# EAGLE board crazypi (EAGLE 9.1.1)
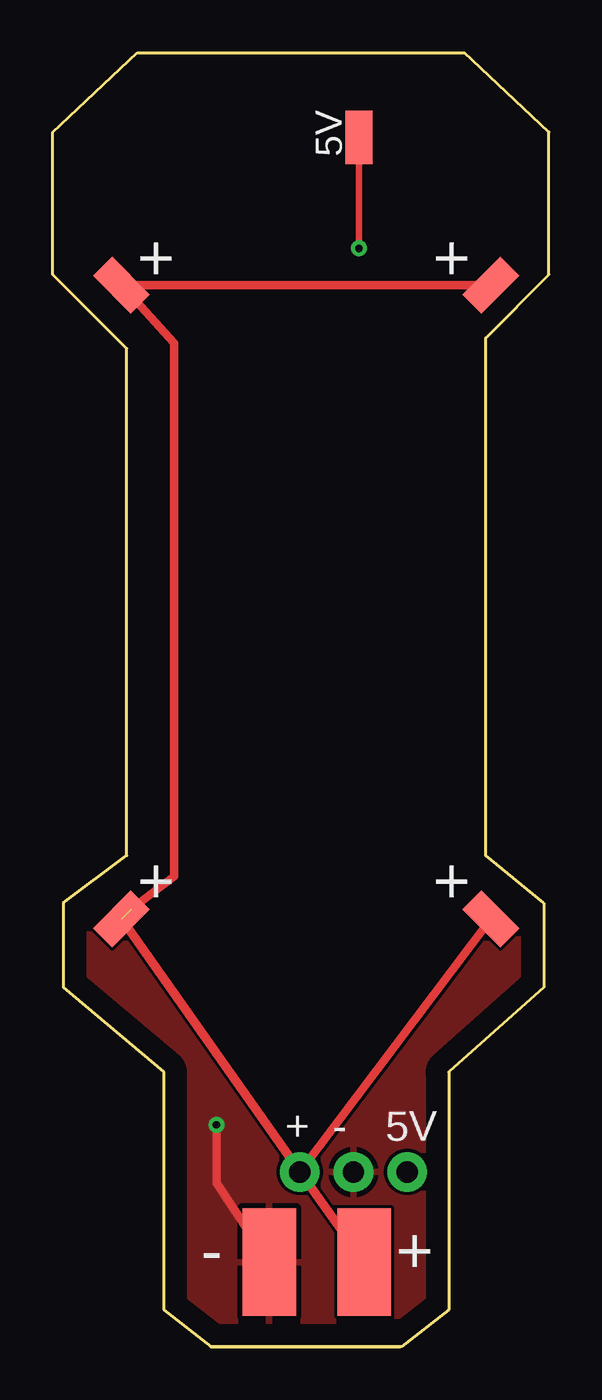
[diagram p0: board, top side]
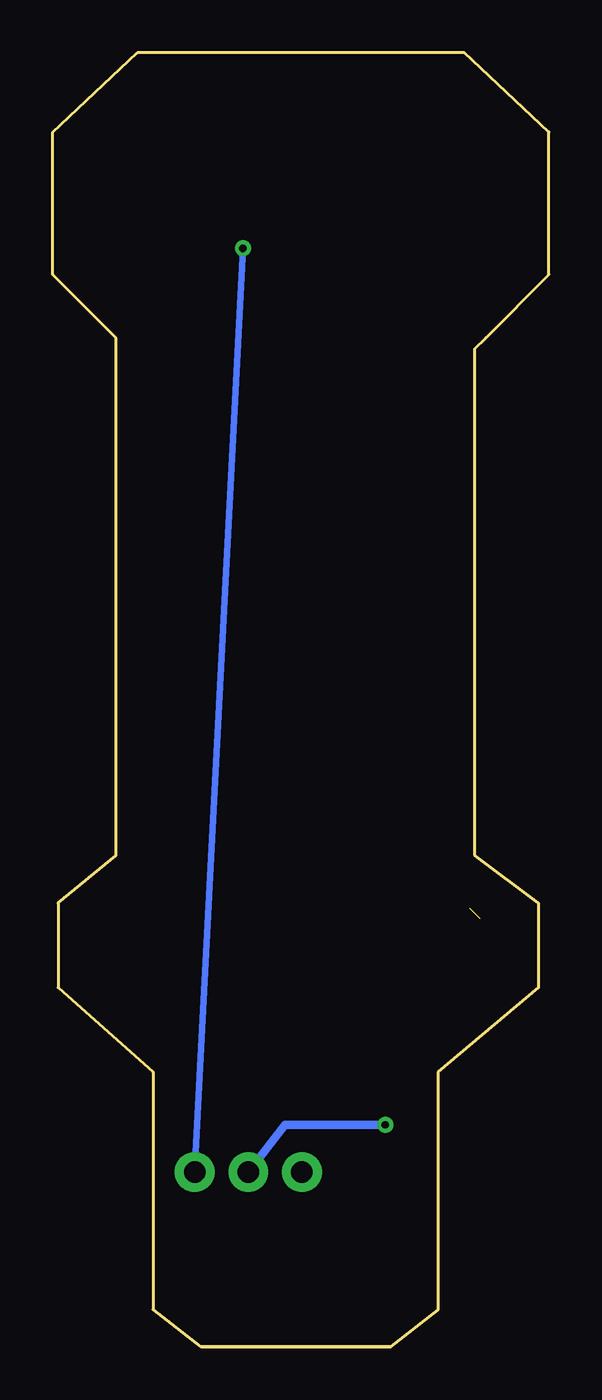
[diagram p1: board, bottom side, seen from below]

Size 23.5 x 61.25 mm. Coordinates in mm from the lower left corner, seen from the top.
Outline: 16.45,0 7.5,0 5.25,1.75 5.25,13 0.5,17 0.5,21 3.5,23.25 3.5,47.25 3,47.75 0,50.75 0,57.5 4,61.25 19.5,61.25 23.5,57.5 23.5,50.75 20.5,47.75 20.5,23.25 23.25,21 23.25,17 18.75,13 18.75,1.75 16.5,0
Copper layers (1*16): Top 0.035mm / dielectric 1.5mm / Bottom 0.035mm
Design rules "default": minimum track width 6mil, minimum drill 0.35mm, track to track 6mil, track to pad 6mil, pad to pad 6mil, via to via 6mil, smd to smd 6mil, copper to edge 40mil, drill to drill 6mil, minimum pad ring 10mil, minimum via ring 8mil, stop-mask expansion 4mil, vias tented up to drill 0mil, thermal gap 10mil

## Footprints (pad centres in the part's own frame; a part is rotated, then mirrored left to right if it is on the bottom)
SMD1,27-2,54 = smd 1.27 x 2.54: 1 0,0
SMD2,54-5,08 = smd 2.54 x 5.08: 1 0,0
1X03_NO_SILK = drill 1.016 pad 1.88: 1 0,0; 2 2.54,0; 3 5.08,0

## Placement (x,y rotation side)
5V  [SMD1,27-2,54]  14.5,57.25 0 top
M1+  [SMD1,27-2,54]  20.75,50.25 315 top
M2+  [SMD1,27-2,54]  20.75,20.25 45 top
M3+  [SMD1,27-2,54]  3.25,20.25 315 top
PWR+  [SMD2,54-5,08]  14.75,4 0 top
PWR-  [SMD2,54-5,08]  10.25,4 0 top
REG  [1X03_NO_SILK]  11.7,8.27 0 top
VB  [SMD1,27-2,54]  3.25,50.25 45 top

## Library data of the parts
5V M1+ M2+ M3+ PWR+ PWR- VB = wirepad
REG = SparkFun-Connectors

## Nets
5V: 5V.1 REG.3
GND: PWR-.1 REG.2
VBAT: M1+.1 M2+.1 M3+.1 PWR+.1 REG.1 VB.1

## Tracks (layer width: path | path; a pad name or v marks a point on that pad's centre or on a via)
5V  (via drill 0.35)
  Top 0.305: 5V.1 v14.5,52
  Bottom 0.305: v14.5,52 REG.3
GND  (via drill 0.35)
  Top 0.406: PWR-.1 7.75,7.75 v7.75,10.5
  Bottom 0.406: v7.75,10.5 12.5,10.5 REG.2
  pour Top: -1.5,-2.25 32.75,-2.25 32.75,-0.5 32.75,63.5 -2,63.5 -2,-2.25
  pour Top: -6.5,68.75 55.75,68.75 55.75,-15.25 -6.5,-15.25
VBAT  (1 unrouted)
  Top 0.406: REG.1 PWR+.1 | M3+.1 REG.1 | M2+.1 REG.1 | M1+.1 VB.1 5.75,47.5 5.75,31.75 | 5.75,31.75 5.75,31.5 | 5.75,31.75 5.75,22.25 3.75,20.75

## Text on the board
tNames: + | + | + | + | + | - | 5V | - | +